# EAGLE board Schem (EAGLE 6.2)
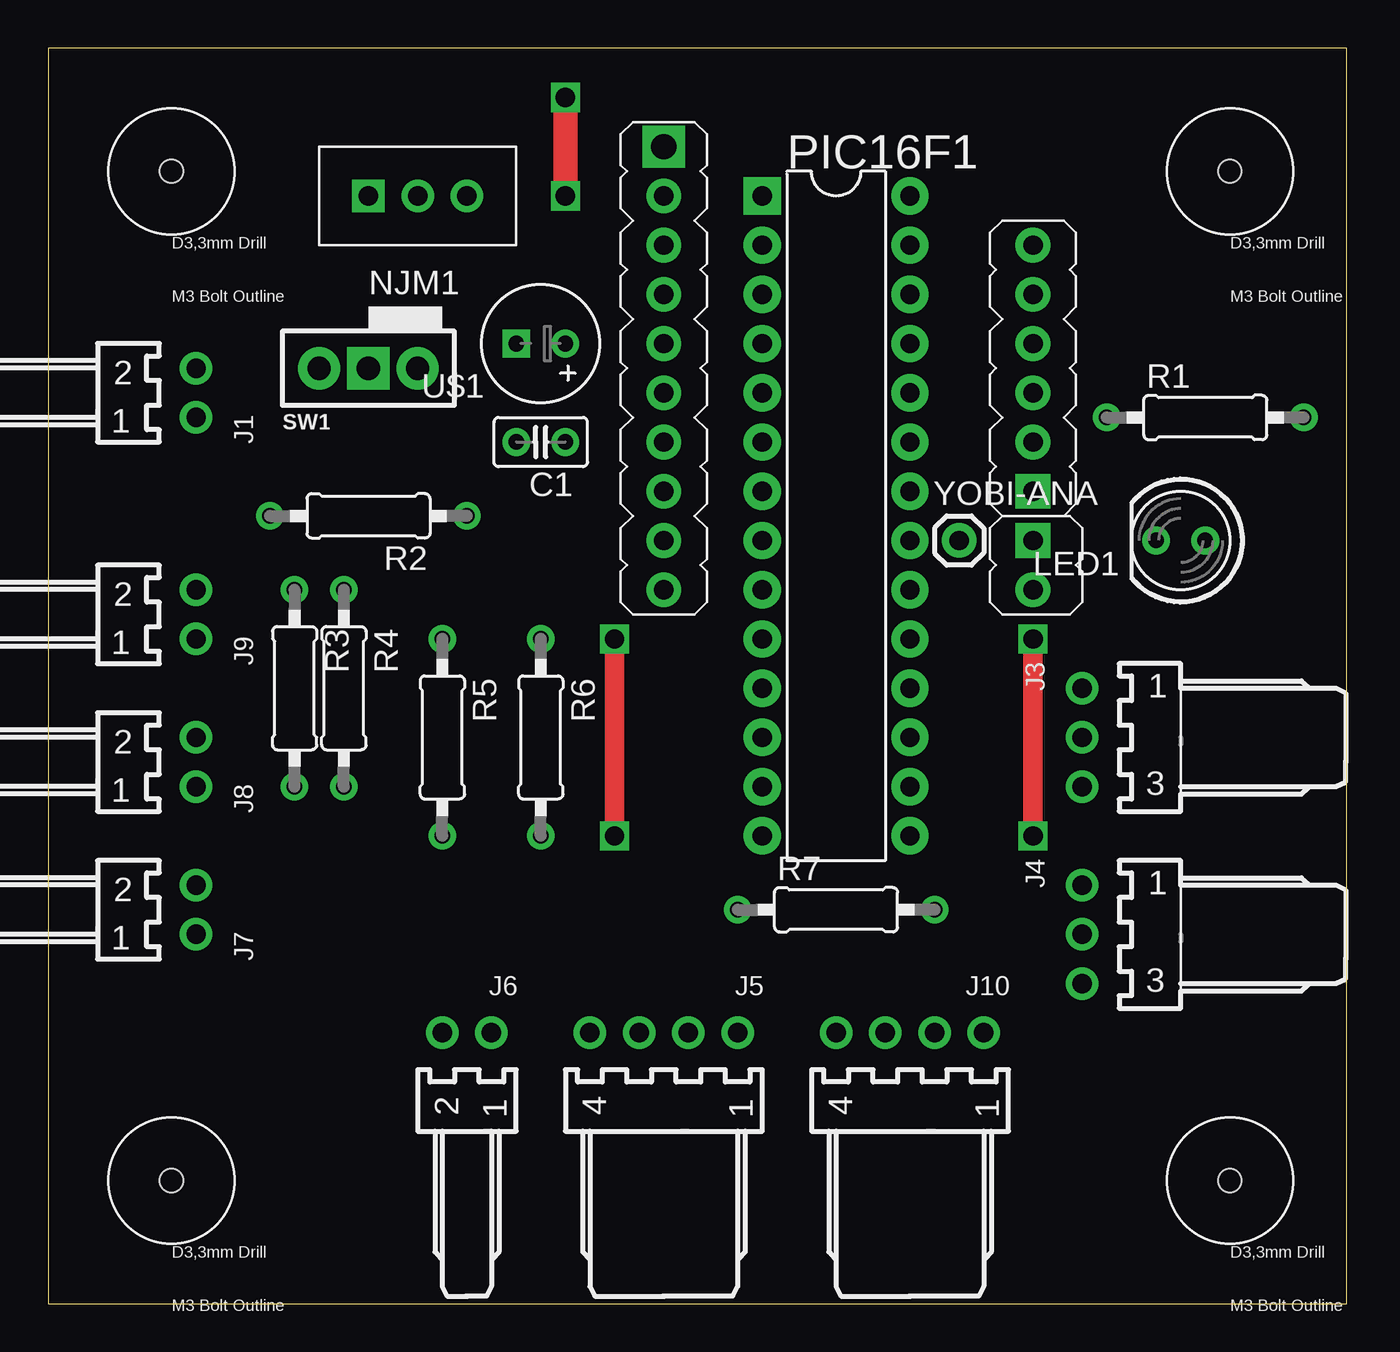
[diagram p0: board, top side]
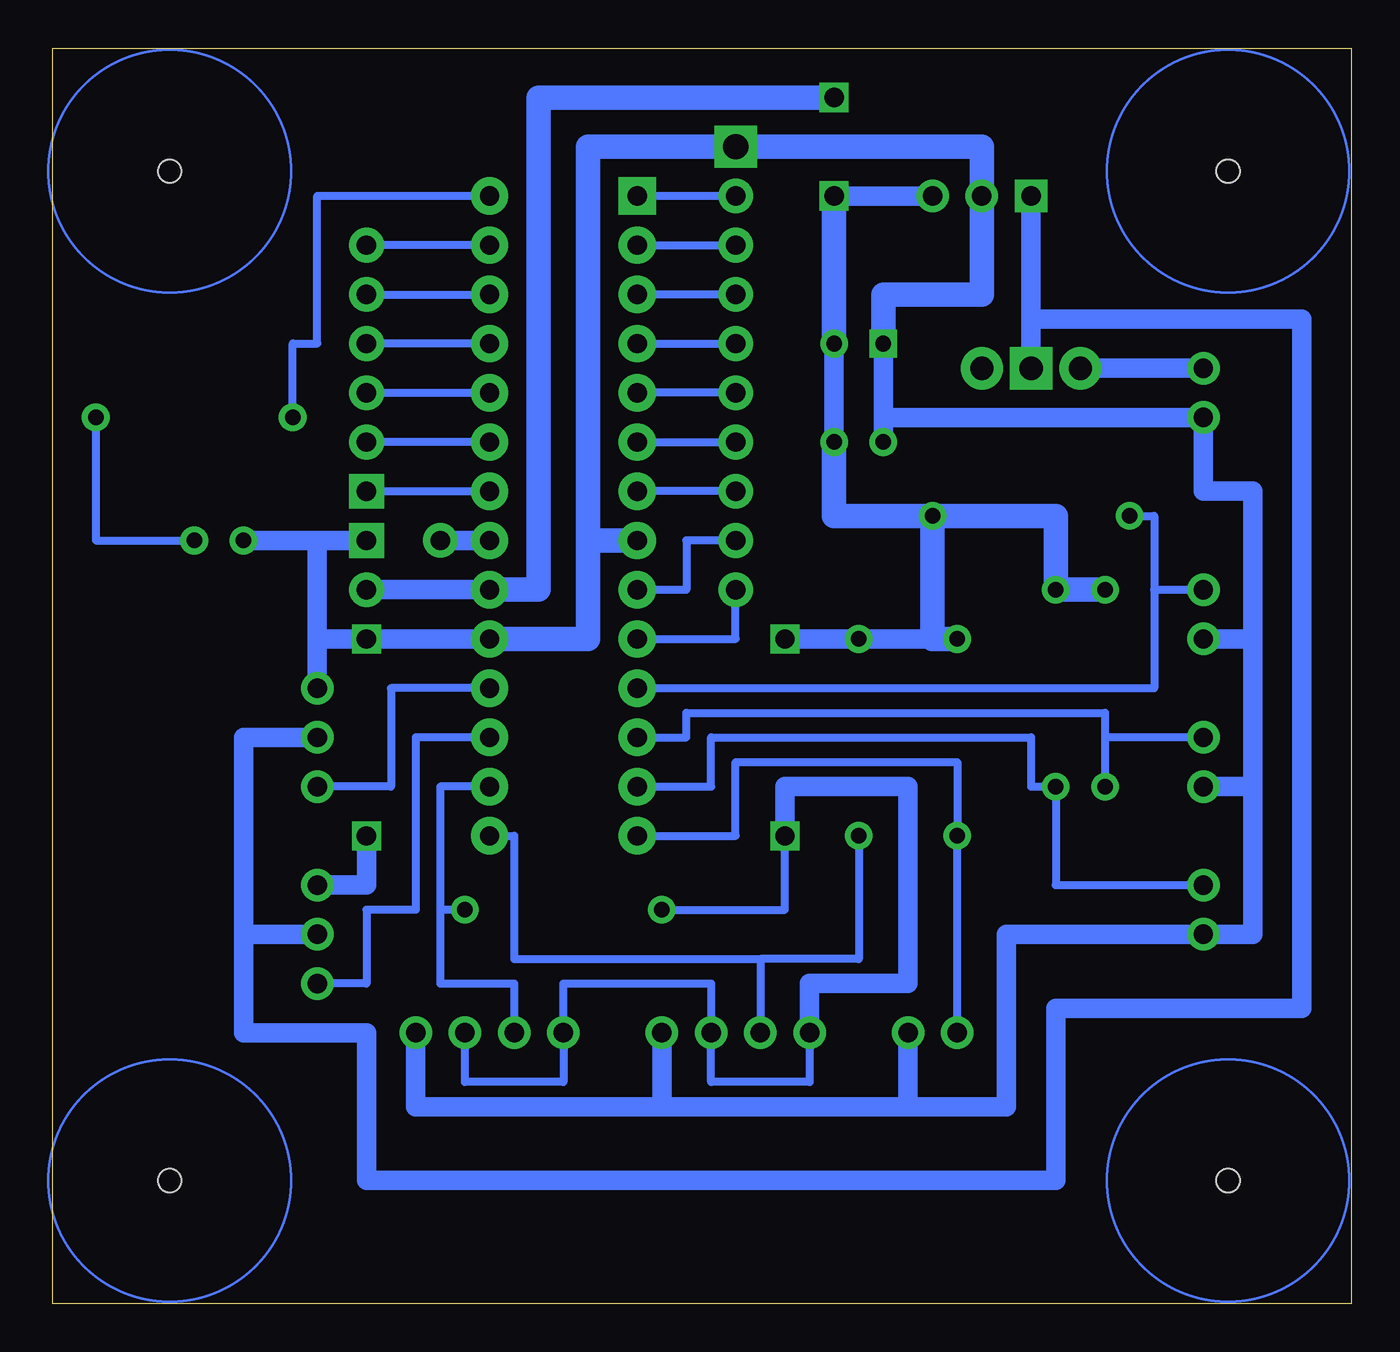
[diagram p1: board, bottom side, seen from below]

Size 66.98 x 64.76 mm. Coordinates in mm from the lower left corner, seen from the top.
Outline: 0,0 66.98,0 66.98,64.76 0,64.76 0,0
Copper layers (1*16): Top 0.035mm / dielectric 1.5mm / Bottom 0.035mm
Design rules: minimum track width 0.15mm, minimum drill 0.3mm, track to track 0.15mm, track to pad 0.15mm, pad to pad 0.15mm, via to via 0.15mm, smd to smd 0.15mm, copper to edge 0.7mm, drill to drill 0.45mm, minimum pad ring 0.15mm, minimum via ring 0.15mm, stop-mask expansion 4mil, vias tented up to drill 0mil, thermal gap 0.15mm

## Footprints (pad centres in the part's own frame; a part is rotated, then mirrored left to right if it is on the bottom)
C-2.54 = drill 0.8 pad 1.422: P$1 -1.27,0; P$2 1.27,0
HOLE3.3 = hole 1.2: 0,0
2PL = drill 1 pad 1.676: 1 1.27,3.81; 2 -1.27,3.81
PINHD1X2 = drill 1 pad 1.8 square: P$1 0,2.54 | drill 1 pad 1.8: P$2 0,0
3PL = drill 1 pad 1.676: 1 2.54,3.81; 2 0,3.81; 3 -2.54,3.81
4PL = drill 1 pad 1.676: 1 3.81,3.81; 2 1.27,3.81; 3 -1.27,3.81; 4 -3.81,3.81
PINHD1X6 = drill 1 pad 1.8 square: 0 0,0 | drill 1 pad 1.8: 1 0,2.54; 2 0,5.08; 3 0,7.62; 8 0,10.16; 9 0,12.7
PINHD1X10 = drill 1.3 pad 2.184 square: 0 0,0 | drill 1 pad 1.8: 1 0,2.54; 2 0,5.08; 3 0,7.62; 4 0,10.16; 5 0,12.7; 6 0,15.24; 7 0,17.78; 8 0,20.32; 9 0,22.86
LED5MM = drill 0.8 pad 1.422: A -1.27,0; K 1.27,0
NJM7805 = drill 1 pad 1.676: GND 0,0; OUT 2.54,0 | drill 1 pad 1.676 square: IN -2.54,0
DIL28-3 = drill 1 pad 1.93 square: 1 -16.51,-3.81 | drill 1 pad 1.93: 2 -13.97,-3.81; 3 -11.43,-3.81; 4 -8.89,-3.81; 5 -6.35,-3.81; 6 -3.81,-3.81; 7 -1.27,-3.81; 8 1.27,-3.81; 9 3.81,-3.81; 10 6.35,-3.81; 11 8.89,-3.81; 12 11.43,-3.81; 13 13.97,-3.81; 14 16.51,-3.81; 15 16.51,3.81; 16 13.97,3.81; 17 11.43,3.81; 18 8.89,3.81; 19 6.35,3.81; 20 3.81,3.81; 21 1.27,3.81; 22 -1.27,3.81; 23 -3.81,3.81; 24 -6.35,3.81; 25 -8.89,3.81; 26 -11.43,3.81; 27 -13.97,3.81; 28 -16.51,3.81
0207/10 = drill 0.8 pad 1.422: 1 -5.08,0; 2 5.08,0
SWITCH_MINI = drill 1.2 pad 2.184: 1 0,2.54; 2 0,-2.54 | drill 1.2 pad 2.184 square: COM 0,0
C-6MM = drill 0.8 pad 1.422: + -1.27,0 | drill 0.8 pad 1.422 square: - 1.27,0
1X01_SMALL = drill 1 pad 1.778: 1 0,0

## Placement (x,y rotation side)
C1  [C-2.54]  25.4,44.45 180 top
H1  HOLE3.3M3BOLT  [HOLE3.3]  6.35,6.35 0 top
H2  HOLE3.3M3BOLT  [HOLE3.3]  60.96,6.35 0 top
H3  HOLE3.3M3BOLT  [HOLE3.3]  6.35,58.42 0 top
H4  HOLE3.3M3BOLT  [HOLE3.3]  60.96,58.42 0 top
J1  2PIN(L)  [2PL]  3.81,46.99 270 top
J2  PINHD1X2  [PINHD1X2]  50.8,36.83 0 top
J3  3PIN(L)  [3PL]  57.15,29.21 90 top
J4  3PIN(L)  [3PL]  57.15,19.05 90 top
J5  4PIN(L)  [4PL]  31.75,10.16 0 top
J6  2PIN(L)  [2PL]  21.59,10.16 0 top
J7  2PIN(L)  [2PL]  3.81,20.32 270 top
J8  2PIN(L)  [2PL]  3.81,27.94 270 top
J9  2PIN(L)  [2PL]  3.81,35.56 270 top
J10  4PIN(L)  [4PL]  44.45,10.16 0 top
JT1  PINHD1X6  [PINHD1X6]  50.8,41.91 0 top
JT2  PINHD1X10  [PINHD1X10]  31.75,59.69 180 top
LED1  [LED5MM]  58.42,39.37 180 top
NJM1  NJM7805  [NJM7805]  19.05,57.15 0 top
PIC16F1  PIC16F886  [DIL28-3]  40.64,40.64 270 top
R1  [0207/10]  59.69,45.72 0 top
R2  [0207/10]  16.51,40.64 180 top
R3  [0207/10]  12.7,31.75 270 top
R4  [0207/10]  15.24,31.75 270 top
R5  [0207/10]  20.32,29.21 270 top
R6  [0207/10]  25.4,29.21 270 top
R7  [0207/10]  40.64,20.32 0 top
SW1  SWITCH_MINI  [SWITCH_MINI]  16.51,48.26 270 top
SW2  SWITCH_MINI  [SWITCH_MINI]  -10.16,5.08 0 top  (outside the outline)
U$1  C-ELEC  [C-6MM]  25.4,49.53 180 top
YOBI-ANA  [1X01_SMALL]  46.99,39.37 0 top

## Library data of the parts
C1 R1-R7 U$1 = My_rcl
H1-H4 J2 JT1 JT2 SW1 SW2 YOBI-ANA = FP-21T for MITS
J1 J3-J10 = my_connector
LED1 = my_led
NJM1 = My_NJM7805
PIC16F1 = FixLib

## Nets
+5V: C1.P$1 J2.P$2 J5.2 J5.4 J10.2 J10.4 NJM1.OUT PIC16F1.20 R2.1 R3.1 R4.1 R5.1 R6.1 R7.1 U$1.+
+12V: J3.2 J4.2 NJM1.IN SW1.COM
GND: C1.P$2 J1.1 J2.P$1 J3.1 J4.1 J5.1 J6.1 J7.1 J8.1 J9.1 J10.1 JT2.0 LED1.K NJM1.GND PIC16F1.8 PIC16F1.19 U$1.-
N$1: JT1.9 PIC16F1.27
N$2: JT1.8 PIC16F1.26
N$3: JT1.3 PIC16F1.25
N$4: JT1.2 PIC16F1.24
N$5: JT1.1 PIC16F1.23
N$6: PIC16F1.28 R1.1
N$7: LED1.A R1.2
N$8: JT1.0 PIC16F1.22
N$9: J4.3 PIC16F1.17
N$10: J3.3 PIC16F1.18
N$11: J9.2 PIC16F1.11 R2.2
N$12: J1.2 SW1.2
N$13: J7.2 PIC16F1.13 R4.2
N$14: J6.2 PIC16F1.14 R5.2
N$15: J8.2 PIC16F1.12 R3.2
N$16: J5.3 PIC16F1.15 R6.2
N$17: PIC16F1.21 YOBI-ANA.1
N$19: JT2.9 PIC16F1.10
N$20: JT2.8 PIC16F1.9
N$21: JT2.7 PIC16F1.7
N$22: JT2.6 PIC16F1.6
N$23: JT2.5 PIC16F1.5
N$24: JT2.4 PIC16F1.4
N$25: JT2.3 PIC16F1.3
N$26: JT2.2 PIC16F1.2
N$27: JT2.1 PIC16F1.1
N$28: J10.3 PIC16F1.16 R7.2

## Tracks (layer width: path | path; a pad name or v marks a point on that pad's centre or on a via)
+5V  (via drill 1)
  Top 1.016: v29.21,34.29 v29.21,24.13
  Top 1.27: v26.67,62.23 v26.67,57.15
  Bottom 0.406: J10.2 45.72,11.43 40.64,11.43 J10.4 40.64,16.51 33.02,16.51 J5.2 33.02,11.43 27.94,11.43 J5.4 | R7.1 29.21,20.32 v29.21,24.13
  Bottom 1.016: U$1.+ C1.P$1 | R5.1 R6.1 v29.21,34.29 | J5.4 27.94,16.51 22.86,16.51 22.86,26.67 29.21,26.67 v29.21,24.13 | NJM1.OUT v26.67,57.15 | PIC16F1.20 J2.P$2
  Bottom 1.27: C1.P$1 26.67,40.64 R2.1 | R3.1 R4.1 15.24,40.64 R2.1 | R5.1 21.59,34.29 R2.1 | PIC16F1.20 41.91,36.83 41.91,62.23 v26.67,62.23 | v26.67,57.15 U$1.+
+12V
  Bottom 1.016: 16.51,50.8 NJM1.IN | 16.51,50.8 2.54,50.8 2.54,15.24 15.24,15.24 15.24,6.35 50.8,6.35 50.8,13.97 57.15,13.97 57.15,19.05 | 57.15,19.05 57.15,29.21 J3.2 | J4.2 57.15,19.05 | SW1.COM 16.51,50.8
GND  (via drill 1)
  Top 1.016: v50.8,34.29 v50.8,24.13
  Bottom 1.016: U$1.- 24.13,45.72 | 24.13,45.72 C1.P$2 | 24.13,45.72 J1.1 7.62,41.91 5.08,41.91 5.08,34.29 | J9.1 5.08,34.29 | 5.08,34.29 5.08,26.67 | 5.08,26.67 5.08,19.05 J7.1 17.78,19.05 17.78,10.16 22.86,10.16 | J8.1 5.08,26.67 | J2.P$1 53.34,39.37 | 53.34,39.37 LED1.K | 53.34,39.37 J3.1 53.34,34.29 v50.8,34.29 PIC16F1.19 | J5.1 35.56,10.16 | 35.56,10.16 22.86,10.16 | 22.86,10.16 J6.1 | v50.8,24.13 50.8,21.59 J4.1 | 35.56,10.16 48.26,10.16 J10.1
  Bottom 1.27: U$1.- 24.13,52.07 19.05,52.07 NJM1.GND 19.05,59.69 JT2.0 39.37,59.69 39.37,39.37 | PIC16F1.8 39.37,39.37 | 39.37,39.37 39.37,34.29 PIC16F1.19
N$1
  Bottom 0.406: PIC16F1.27 JT1.9
N$2
  Bottom 0.406: JT1.8 PIC16F1.26
N$3
  Bottom 0.406: PIC16F1.25 JT1.3
N$4
  Bottom 0.406: JT1.2 PIC16F1.24
N$5
  Bottom 0.406: PIC16F1.23 JT1.1
N$6
  Bottom 0.406: R1.1 54.61,49.53 53.34,49.53 53.34,57.15 PIC16F1.28
N$7
  Bottom 0.406: R1.2 64.77,40.64 64.77,39.37 LED1.A
N$8
  Bottom 0.406: JT1.0 PIC16F1.22
N$9
  Bottom 0.406: J4.3 50.8,16.51 50.8,20.32 48.26,20.32 48.26,29.21 PIC16F1.17
N$10
  Bottom 0.406: J3.3 49.53,26.67 49.53,31.75 PIC16F1.18
N$11
  Bottom 0.406: 10.16,36.83 J9.2 | R2.2 10.16,40.64 10.16,36.83 | 10.16,36.83 10.16,31.75 PIC16F1.11
N$12
  Bottom 1.016: SW1.2 J1.2
N$13
  Bottom 0.406: J7.2 15.24,21.59 R4.2 16.51,26.67 16.51,29.21 33.02,29.21 33.02,26.67 PIC16F1.13
N$14
  Bottom 0.406: J6.2 R5.2 20.32,27.94 31.75,27.94 31.75,24.13 PIC16F1.14
N$15
  Bottom 0.406: J8.2 12.7,29.21 | 12.7,29.21 R3.2 | 12.7,29.21 12.7,30.48 34.29,30.48 34.29,29.21 PIC16F1.12
N$16
  Bottom 0.406: 30.48,17.78 25.4,17.78 R6.2 | 30.48,17.78 J5.3 | 30.48,17.78 43.18,17.78 43.18,24.13 PIC16F1.15
N$17
  Bottom 1.016: PIC16F1.21 YOBI-ANA.1
N$19
  Bottom 0.406: JT2.9 31.75,34.29 PIC16F1.10
N$20
  Bottom 0.406: JT2.8 34.29,39.37 34.29,36.83 PIC16F1.9
N$21
  Bottom 0.406: JT2.7 PIC16F1.7
N$22
  Bottom 0.406: PIC16F1.6 JT2.6
N$23
  Bottom 0.406: JT2.5 PIC16F1.5
N$24
  Bottom 0.406: PIC16F1.4 JT2.4
N$25
  Bottom 0.406: JT2.3 PIC16F1.3
N$26
  Bottom 0.406: PIC16F1.2 JT2.2
N$27
  Bottom 0.406: JT2.1 PIC16F1.1
N$28
  Bottom 0.406: PIC16F1.16 46.99,26.67 46.99,20.32 | 46.99,20.32 46.99,16.51 43.18,16.51 J10.3 | R7.2 46.99,20.32